# Altium PCB Thermometer.PcbDoc
Units mm, origin at the board's own origin, x right, y up, seen from the top; angles counter-clockwise.
Board outline 30 x 30 mm, 2 copper layers (Top Layer, Bottom Layer); 18 components, 14 nets, 74 pads, 367 vias.
Unrouted connection lines stored in the file: 6.
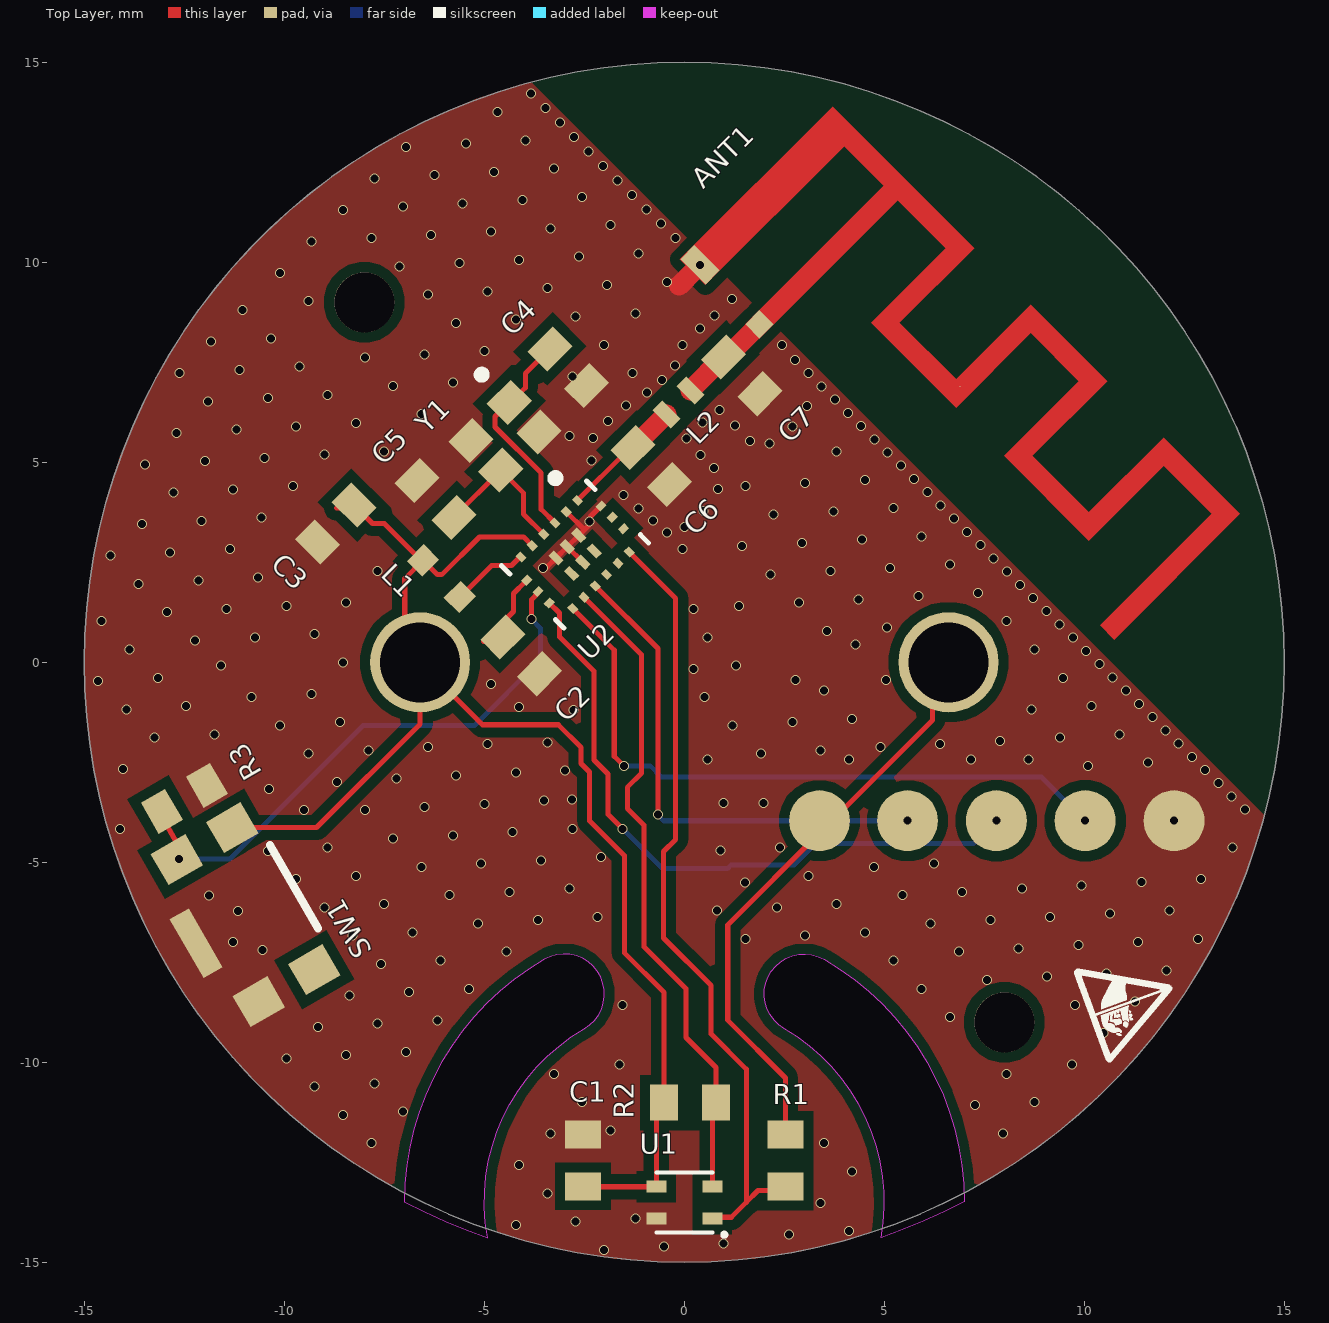
[diagram p0: Top Layer view]
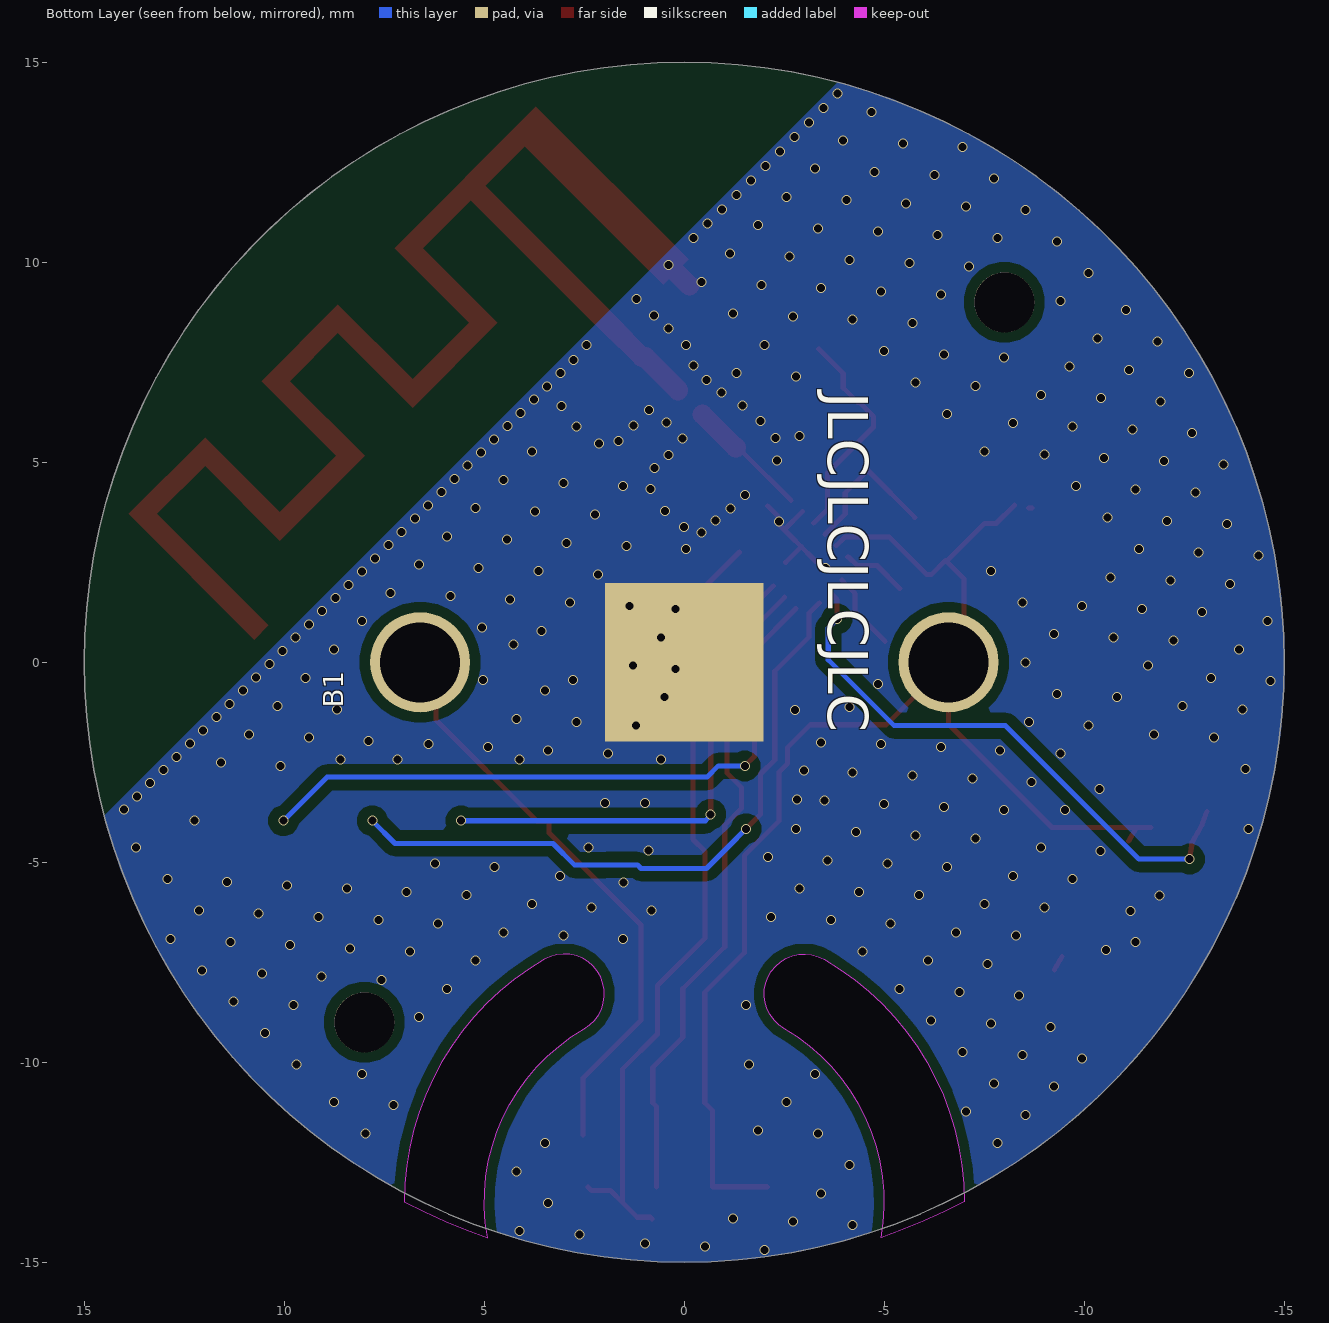
[diagram p1: Bottom Layer view, seen from below]
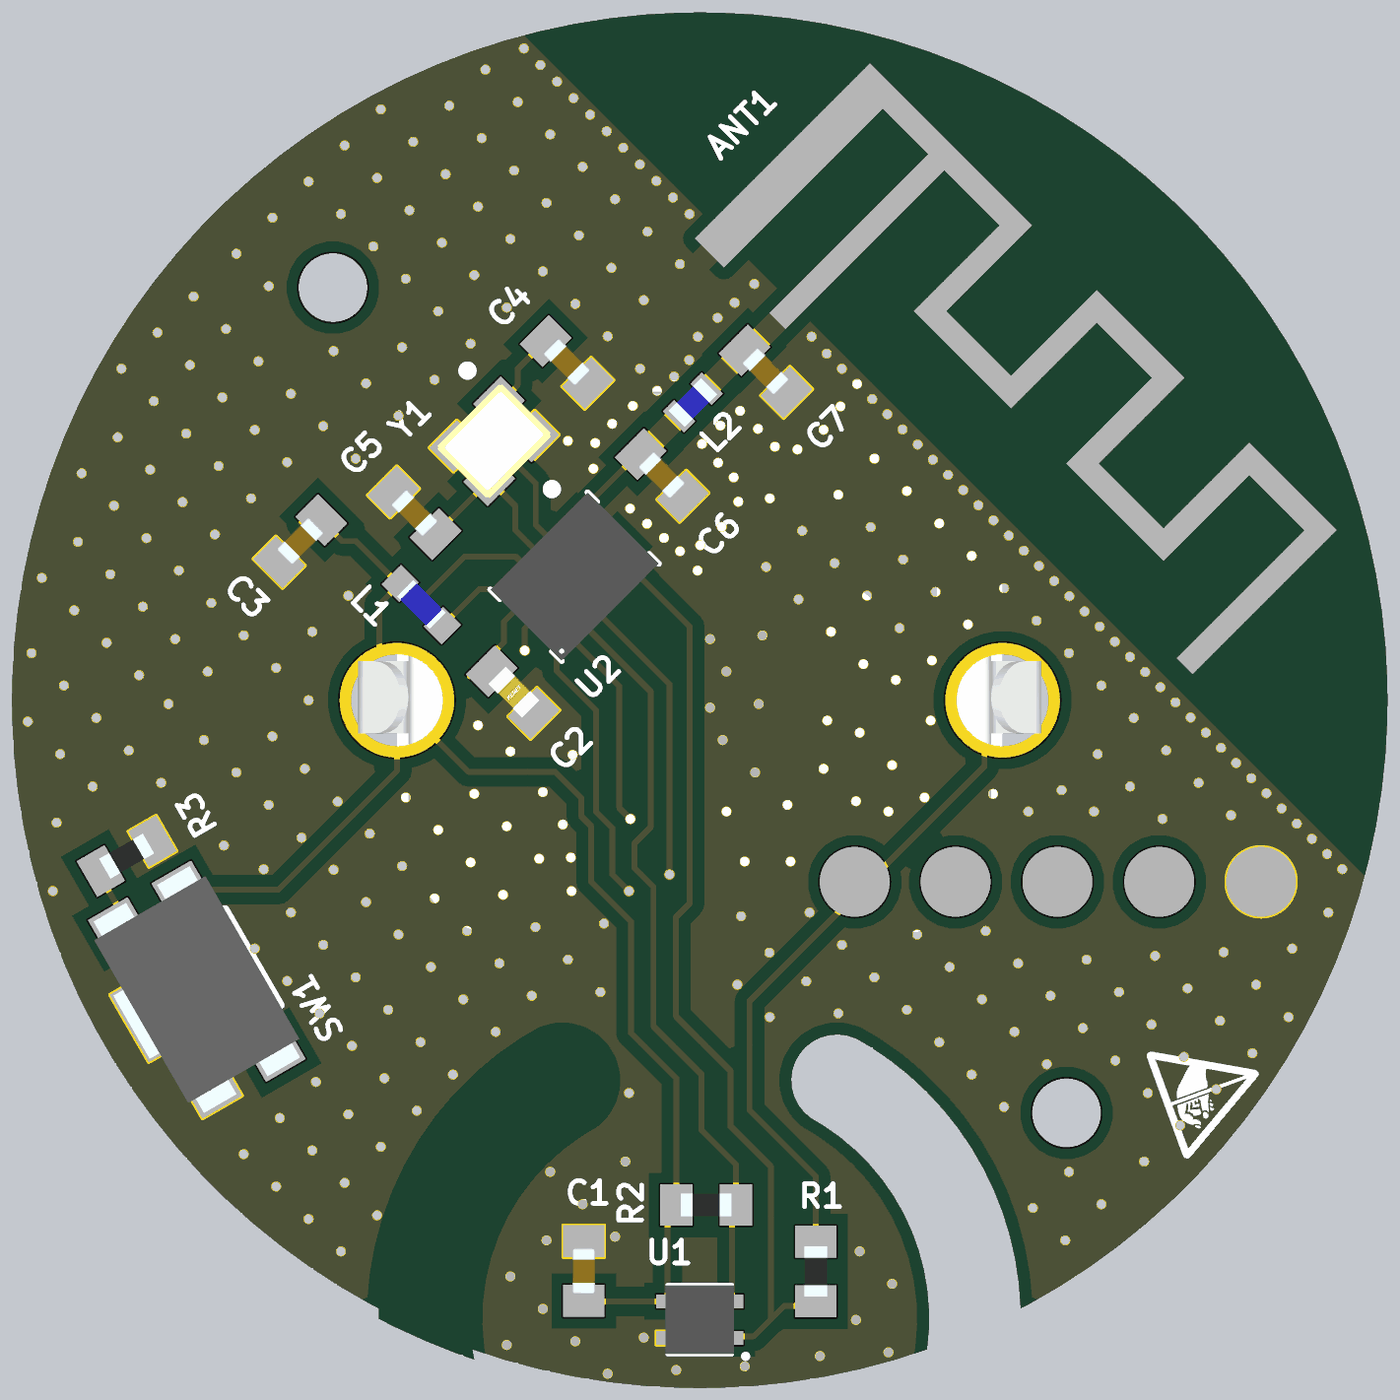
[diagram p2: 3D render of the assembled board from above, using the file's embedded part models]

## Layer stack, top to bottom
Top Solder: solder mask 0.0102, Solder Resist, Dk 3.5
Top Layer: signal copper 0.0356
Dielectric 1: dielectric 0.32, FR-4, Dk 4.8
Bottom Layer: signal copper 0.0356
Bottom Solder: solder mask 0.0102, Solder Resist, Dk 3.5

## Board outline
-15,0 ccw(c0,0) 0,-15 ccw(c0,0) 15,0 ccw(c0,0) 0,15 ccw(c0,0)
cut-out: 4.919,-14.384 ccw(c0,-13.49) 2.5,-9.16 2.497,-9.158 cw(c2.997,-8.292) 3.497,-7.426 3.5,-7.428 cw(c0,-13.49) 7,-13.49 cw(c0,0)
cut-out: -7,-13.49 ccw(c0,0) -4.918,-14.38 -4.919,-14.384 cw(c0,-13.49) -2.5,-9.16 -2.497,-9.158 ccw(c-2.997,-8.292) -3.497,-7.426 -3.5,-7.428 ccw(c0,-13.49)

## Design rules (kind name [scope] priority, off if disabled: settings)
Clearance [All] p1: gap=0.254 ignorepadtopadclearanceinfootprint=TRUE except(0: Arc-Hole Track-Hole SMDPad-Hole THPad-Hole Via-Hole Fill-Hole Poly-Hole Region-Hole Text-Hole; 0.1: Arc-SMDPad Track-SMDPad; 0.127: Arc-Arc Arc-Track Track-Track SMDPad-SMDPad; 0.2: Arc-THPad Track-THPad; 0.5: THPad-THPad)
HoleSize [All] p1: absolutevalues=TRUE maxlimit=6.35 minlimit=0.2 maxpercent=80.000 minpercent=20.000
MinimumSolderMaskSliver MinimumSolderMaskSliver_BGA [HasFootprint('BGA17C25P5X7_169X203X35')] p1: minsoldermaskwidth=0.09
MinimumSolderMaskSliver [All] p2: minsoldermaskwidth=0.1
PlaneConnect [All] p1: planeconnectstyle=Direct reliefexpansion=0.508 reliefentries=4 reliefconductorwidth=0.254 reliefairgap=0.254
PolygonConnect [All] p1: connectstyle=Direct reliefconductorwidth=0.254 reliefentries=4 polygonreliefangle="90 Angle" airgapwidth=0.254
RoutingVias [All] p1: holewidth=0.2 width=0.3 viastyle="Through Hole" minholewidth=0.15 minwidth=0.25 maxholewidth=0.25 maxwidth=1.27
ShortCircuit ShortCircuit_ANT [InNet('ANT')] p1: allowed=TRUE
ShortCircuit [All] p2: allowed=FALSE
SilkToSolderMaskClearance [IsPad] p1: minsilkscreentomaskgap=0.1 clearancetoexposedcopper=TRUE
SolderMaskExpansion [All] p1: expansion=0.038 istentingtop=FALSE
Width [All] p1: maxlimit=0.9 minlimit=0.127 preferedwidth=0.127
25 further rules are at their usual default settings.

## Components (designator, comment, footprint, x,y, rotation, side; value= is the part's Value field where it differs from the comment)
ANT1 "SWRA117" SWRA117 1.878,8.453 r315 top
B1 "2997" 2997 0,0 r0 bottom
C1 "GRM155R71A104MA01D" CAPC1005X60 -2.53,-12.45 r90 top value=0.1uF
C2 "C0402C105K8PAC7411" CAPC1005X60 -4.078,0.173 r315 top
C3 "GRM155R60J106ME05J" CAPC1005X60 -8.713,3.47 r225 top value=10uF
C4 "GCM1555C1H8R0DA16D" CAPC1005X60 -2.901,7.376 r315 top value=8pF
C5 "GCM1555C1H8R0DA16D" CAPC1005X60 -6.221,4.084 r135 top value=8pF
C6 "GRM1555C2A1R8CA01D" CAPC1005X60 -0.829,4.909 r315 top value=1.8pF
C7 "GRM1555C2A1R8CA01D" CAPC1005X60 1.436,7.174 r315 top value=1.8pF
L1 "MLZ1005M2R2WT000" INDC1005X55N -6.072,2.091 r135 top
L2 "LQG15HN3N3S02D" LQG15WH0N7B02D -0.148,6.495 r45 top
R1 "RC0402FR-7W10KL" RES1005 2.53,-12.46 r90 top value=10k
R2 "RC0402FR-7W10KL" RES1005 0.14,-11.01 r180 top value=10k
R3 "RC0402FR-7W10KL" RES1005 -12.5,-3.4 r210 top value=10k
SW1 "435441019830" 435441019830 -10.97,-6.31 r120 top
U1 "STS40-AD1B-R3" STS4X 0,-13.51 r180 top
U2 "DA14531-00000FX2" XCVR_DA14531-00000FX2 -2.73,2.696 r315 top
Y1 "ECS-320-6-37B2-CKM-TR" XTAL_ECS-320-6-37B2-CKM-TR -4.483,5.652 r315 top

## Footprints (in the part's own frame and the unit in brackets; to place one, negate y for a bottom-side part, rotate by r counter-clockwise, add the part's x,y. Pads: shape width x height; smd on the part's side, far side on the other; paste and mask are expansions set on the pad)
2997 [mm]
  round 2.5 hole 2: 1(-6.605,0) 2(6.605,0)
  rect 3.96x3.96 smd: 3(0,0)
  body extent -7.45,-6.99 7.45,5.08, height 6.25
435441019830 [mm]
  rect 0.9x1 smd: 1(2.05,0.8) 2(2.05,-0.8) 3(-2.05,-0.8) 4(-2.05,0.8)
  rect 1.7x0.55 smd: G1(0,1.425)
  silkscreen extent -1.2,-1.4 1.2,-1.4, body extent -2.41,-1.4 2.41,1.65, height 2
CAPC1005X60 [mm]
  rect 0.7x0.9 smd: 1(-0.65,0) 2(0.65,0)
  body extent -0.5,-0.25 0.5,0.25, height 0.55
INDC1005X55N [mm]
  rect 0.55x0.6 smd: 1(-0.65,0) 2(0.65,0)
  body extent -0.5,-0.25 0.5,0.25, height 0.55
LQG15WH0N7B02D [mm]
  rect 0.35x0.65 smd: 1(-0.425,0) 2(0.425,0)
  body extent -0.5,-0.25 0.5,0.25, height 0.55
RES1005 [mm]
  rect 0.7x0.9 smd: 1(-0.65,0) 2(0.65,0)
  body extent -0.55,-0.25 0.55,0.25, height 0.4
STS4X [mm]
  rect 0.5x0.3 smd: 1(-0.7,0.4) 2(-0.7,-0.4) 3(0.7,-0.4) 4(0.7,0.4)
  silkscreen extent -1.05,-0.75 0.7,0.85, body extent -0.75,-0.75 0.75,0.75, height 0.55
SWRA117 [mm]
  rect 0.5x0.5 smd mask+0: 1(0,0)
  round 0.025 smd mask+0: 1(4.65,2.44)
  rect 0.9x0.5 smd mask+0: 2(-2.1,0)
  Top Layer region: -2.55,-0.26 -1.65,-0.26 -1.65,4.64 -0.25,4.64 -0.25,-0.26 0.25,-0.26 0.25,4.64 1.95,4.64 1.95,2 4.95,2 4.95,4.64 6.65,4.64 6.65,2 9.65,2 9.65,4.64 11.35,4.64 11.35,0.7 11.85,0.7 11.85,5.14 9.15,5.14 9.15,2.5 7.15,2.5 7.15,5.14 4.45,5.14 4.45,2.5 2.45,2.5 2.45,5.14 -2.55,5.14
XCVR_DA14531-00000FX2 [mm]
  rect 0.225x0.18 smd: 1(-0.912,1) 2(-0.912,0.6) 3(-0.912,0.2) 4(-0.912,-0.2) 5(-0.912,-0.6) 6(-0.912,-1) 10(0.912,-1) 11(0.912,-0.6) 12(0.912,-0.2) 13(0.912,0.2) 14(0.912,0.6) 15(0.912,1)
  rect 0.18x0.225 smd: 7(-0.4,-1.313) 8(0,-1.313) 9(0.4,-1.313) 16(0.4,1.313) 17(0,1.313) 18(-0.4,1.313)
  rect 0.35x0.2 smd: 19(-0.275,0.4) 20(-0.275,0) 21(-0.275,-0.4) 22(0.275,-0.4) 23(0.275,0) 24(0.275,0.4)
  silkscreen extent -1.8,-1.5 1.1,1.5, body extent -1.1,-1.5 1.1,1.5, height 0.7
XTAL_ECS-320-6-37B2-CKM-TR [mm]
  rect 0.75x0.85 smd: 1(-0.525,0.675) 2(-0.525,-0.675) 3(0.525,-0.675) 4(0.525,0.675)
  silkscreen extent -1.6,0.58 -1.4,0.77, body extent -0.8,-1 0.8,1, height 0.5

## Part data
ANT1: "TI 2.4Ghz PCB Antenna"
B1: "Coin Cell Battery Holders THM .520x.585x.500 No Hole"
C1: "Multilayer Ceramic Capacitors MLCC - SMD/SMT 0.1 uF 10 VDC 20% 0402 X7R"
C2: "Multilayer Ceramic Capacitors MLCC - SMD/SMT 10V 1uF X5R 0402 10%"
C3: "Multilayer Ceramic Capacitors MLCC - SMD/SMT 10 uF 6.3 VDC 20% 0402 X5R"
C4 C5: "Multilayer Ceramic Capacitors MLCC - SMD/SMT 8 pF 50 VDC 0.5 pF 0402 C0G (NP0) AEC-Q200"
C6 C7: "Multilayer Ceramic Capacitors MLCC - SMD/SMT 1.8 pF 100 VDC 0.25 pF 0402 C0G (NP0)"
L1: "Inductor Power Shielded Multi-Layer 2.2uH 20% 2MHz Ferrite 350mA 715mOhm DCR 0402 T/R", Manufacturer_Name=TDK, Mouser Part Number=810-MLZ1005M2R2WT000, Datasheet Link=https://product.tdk.com/system/files/dam/doc/product/inductor/inductor/smd/catalog/inductor_commercial_decoupling_mlz1005_en.pdf, Geometry.Height=0.55mm, Manufacturer_Part_Number=MLZ1005M2R2WT000, Mouser Price/Stock=https://www.mouser.co.uk/ProductDetail/TDK/MLZ1005M2R2WT000?qs=%2FPzWLGNeQ%252BiWY3SLL2a3ow%3D%3D
L2: "Murata LQQ15HN Series Wire-wound SMD Inductor 0.0033 uH +/-0.3nH 300mA Idc Q:8", Manufacturer_Name="Murata Electronics", Mouser Part Number=81-LQG15HN3N3S02D, Datasheet Link=https://psearch.en.murata.com/inductor/product/LQG15HN3N3S02%23.html, Geometry.Height=0.55mm, Manufacturer_Part_Number=LQG15HN3N3S02D, Mouser Price/Stock=https://www.mouser.co.uk/ProductDetail/Murata-Electronics/LQG15HN3N3S02D?qs=wJtOAfHdpWANFtzVLk4I7Q%3D%3D
R1 R2 R3: "Thick Film Resistors - SMD 10 kOhms 125mW 0402 1%", Package=None, Availability=Unavailable, MP=CRCW060310K0FKEBC, Price=None
SW1: "Tactile Switches WS-TASV Tact Switch Washable 4.1x2.8x1.9 mm SMT", Manufacturer_Name="Wurth Elektronik", Mouser Part Number=710-435441019830, Datasheet Link=https://www.we-online.com/catalog/datasheet/435441019830.pdf, Geometry.Height=1.9mm, Manufacturer_Part_Number=435441019830, Mouser Price/Stock=https://www.mouser.co.uk/ProductDetail/Wurth-Elektronik/435441019830?qs=ufv2HEpFn%252BQgnhl%2FsZ0Vfw%3D%3D
U1: "Digital Temperature Sensor, Â±0.2 Â°C, Ultra-Low-Power, I2C fast mode plus", Package="DFN-4 Sensirion", Availability="In Stock", Check_prices=https://www.snapeda.com/parts/STS40-AD1B-R3/Sensirion/view-part/?ref=eda, MF=Sensirion, MP=STS40-AD1B-R3, Price=None, Purchase-URL=https://pricing.snapeda.com/search/part/STS40-AD1B-R3/?ref=eda, SnapEDA_Link=https://www.snapeda.com/parts/STS40-AD1B-R3/Sensirion/view-part/?ref=snap
U2: "IC RF TxRx + MCU Bluetooth Bluetooth v5.1 2.4GHz FCGQFN 24", Package="FCGQFN-24 Dialog Semiconductor GmbH", Check_prices=https://www.snapeda.com/parts/DA14531-00000FX2/Dialog+Semiconductor/view-part/?ref=eda, MF="Dialog Semiconductor GmbH", MP=DA14531-00000FX2, SnapEDA_Link=https://www.snapeda.com/parts/DA14531-00000FX2/Dialog+Semiconductor/view-part/?ref=snap
Y1: "Crystals ESR 50,FREQ 32,STABILITY +/-10ppm,TOLERANCE +/-10ppm,CL 6pF,AGING +/-2 ppm ,-20 C 70 C,10uW in typical (Max 100uW),2.00mm x 1.60mm", Package=None, Availability="In Stock", Check_prices=https://www.snapeda.com/parts/ECS-320-6-37B2-CKM-TR/ECS+Inc./view-part/?ref=eda, MF="ECS Inc.", MP=ECS-320-6-37B2-CKM-TR, Price=None, Purchase-URL=https://pricing.snapeda.com/search/part/ECS-320-6-37B2-CKM-TR/?ref=eda, SnapEDA_Link=https://www.snapeda.com/parts/ECS-320-6-37B2-CKM-TR/ECS+Inc./view-part/?ref=snap

## Free pads (board coordinates)
  round 1.5 hole 1.5 unplated: ""(-8,9) ""(8,-9)
  round 1.524 smd: ""(3.38,-3.96) ""(5.58,-3.96) ""(7.801,-3.96) ""(10.022,-3.96) ""(12.243,-3.96)

## Via types
v1: diameter 0.25, hole 0.2, Top Layer to Bottom Layer, tented both sides, 367 vias

## Nets (pads, with @x,y where several pads share a name; then routed paths per layer and width w, separated by ;. In a path a pad name is that pad's centre, name@x,y a point inside that pad or via, vN(x,y) a via of type N, cw(c..) or ccw(c..) an arc to the next point about the centre after c; other vN are vias at no path point)
ANT: ANT1.1 C7.1 L2.2 | length 2.4
  Top Layer w0.5: L2.2 0.152,6.803 0.976,7.627 C7.1 1.059,7.634 ANT1.1@1.878,8.453
GND: ANT1.2 B1.3 C1.2 C2.2 C3.2 C4.2 C5.2 C6.2 C7.2 pad.@12.243,-3.96 R3.1 SW1.4 SW1.G1 U1.4 U2.2 U2.18 U2.19 U2.20 U2.21 U2.23 Y1.2 Y1.4 | length 4.1
  Top Layer w0.127: v1(-3.529,2.364) -3.505,2.387 -3.427,2.387 U2.21 U2.20 ; U2.2 -2.517,3.332 -2.517,3.298 ; U2.23 U2.20 ; U2.18 -2.345,3.646 -2.345,3.547 v1(-2.369,3.524) -2.392,3.5 -2.392,3.422 -2.517,3.298 ; -0.13,9.4 -0.13,9.414 ; ANT1.2@0.261,9.806 v1(0.393,9.938) ; U2.20 U2.19 -2.517,3.298
  Top Layer w0.5: -0.13,9.414 ANT1.2@0.261,9.806
  other v1: -2.008,-14.689 -0.514,-14.609 0.981,-14.528 2.62,-14.303 4.115,-14.223 -4.21,-14.062 -2.715,-13.982 -1.221,-13.902 3.408,-13.516 -3.422,-13.275 4.195,-12.728 -4.129,-12.568 -7.825,-12.021 3.488,-12.021 -3.342,-11.78 7.972,-11.78 -1.847,-11.7 -8.533,-11.314 -7.038,-11.234 7.265,-11.073 -2.555,-10.993 8.759,-10.993 -9.24,-10.607 -7.745,-10.527 -3.262,-10.286 8.052,-10.286 -1.622,-10.061 9.692,-10.061 -9.947,-9.9 -8.452,-9.82 -6.958,-9.739 10.479,-9.273 -9.159,-9.112 -7.665,-9.032 -6.17,-8.952 6.638,-8.872 -1.542,-8.566 9.772,-8.566 11.266,-8.486 -8.372,-8.325 -6.877,-8.245 -5.383,-8.164 5.931,-8.164 7.57,-7.939 9.065,-7.859 10.559,-7.779 12.054,-7.698 -7.585,-7.538 -6.09,-7.457 5.224,-7.457 -4.451,-7.232 6.863,-7.232 -10.54,-7.19 8.358,-7.152 9.852,-7.071 -11.281,-6.991 11.347,-6.991 1.528,-6.911 12.841,-6.911 -8.292,-6.831 3.022,-6.831 -6.797,-6.75 4.517,-6.75 -5.158,-6.525 6.156,-6.525 -3.663,-6.445 7.651,-6.445 -2.169,-6.364 9.145,-6.364 10.64,-6.284 -11.16,-6.22 0.82,-6.204 12.134,-6.204 2.323,-6.131 -8.999,-6.123 -7.504,-6.043 3.809,-6.043 -11.88,-5.83 -5.865,-5.818 5.449,-5.818 -4.37,-5.738 6.943,-5.738 -2.876,-5.657 8.438,-5.657 9.932,-5.577 1.519,-5.505 11.427,-5.497 -9.706,-5.416 12.922,-5.416 -8.211,-5.336 3.102,-5.336 -6.572,-5.111 4.742,-5.111 -5.077,-5.03 6.236,-5.03 -3.583,-4.95 -2.088,-4.87 -10.405,-4.717 0.901,-4.709 -8.918,-4.629 2.395,-4.629 13.709,-4.629 -7.279,-4.404 -5.784,-4.323 -4.29,-4.243 -14.109,-4.163 -2.795,-4.163 12.243,-3.96 -9.511,-3.687 -7.986,-3.697 14.014,-3.684 -6.492,-3.616 -4.997,-3.536 0.981,-3.517 1.98,-3.517 -3.503,-3.456 -2.813,-3.43 13.683,-3.353 -10.379,-3.168 13.353,-3.023 -8.686,-2.997 -7.199,-2.909 -5.704,-2.829 -4.21,-2.749 -2.988,-2.71 13.022,-2.692 -14.029,-2.668 10.093,-2.588 11.588,-2.508 0.583,-2.427 4.115,-2.427 7.166,-2.427 8.599,-2.427 12.691,-2.361 -9.4,-2.282 1.913,-2.282 -7.898,-2.21 3.408,-2.202 -6.411,-2.122 4.902,-2.122 -4.917,-2.041 6.397,-2.041 12.361,-2.031 -3.422,-2.003 7.891,-1.961 -13.241,-1.881 9.386,-1.881 -11.747,-1.801 10.881,-1.801 12.03,-1.7 -10.107,-1.575 1.206,-1.575 -8.613,-1.495 2.701,-1.495 4.195,-1.415 11.699,-1.369 -13.949,-1.174 -2.773,-1.192 8.679,-1.174 -4.129,-1.117 -12.454,-1.093 10.173,-1.093 11.368,-1.038 -10.815,-0.868 0.499,-0.868 -9.32,-0.788 3.488,-0.708 11.038,-0.708 -4.836,-0.547 -14.656,-0.467 2.781,-0.443 5.037,-0.443 -13.161,-0.386 9.466,-0.386 10.707,-0.377 0.225,-0.161 -11.587,-0.081 1.287,-0.081 10.376,-0.046 -8.533,0 10.045,0.285 -13.868,0.321 8.759,0.321 4.276,0.443 -12.229,0.546 -10.734,0.626 0.579,0.626 9.715,0.615 -9.24,0.707 3.569,0.787 5.063,0.867 9.384,0.946 -14.575,1.028 8.052,1.028 -12.936,1.253 9.053,1.277 -11.441,1.334 0.225,1.334 -9.947,1.414 1.367,1.414 -8.452,1.494 2.861,1.494 4.356,1.574 8.722,1.608 5.85,1.655 7.345,1.735 8.392,1.938 -13.643,1.96 -12.148,2.041 -10.654,2.121 2.154,2.201 -7.665,2.282 3.649,2.282 8.061,2.269 5.143,2.362 6.638,2.442 7.73,2.6 -14.35,2.667 -12.856,2.748 -11.361,2.828 -0.047,2.828 1.447,2.908 7.4,2.93 2.942,2.989 4.436,3.069 5.931,3.149 -0.43,3.25 7.069,3.261 0.01,3.38 -13.563,3.455 -12.068,3.535 -0.78,3.54 6.738,3.592 -10.574,3.615 2.235,3.696 0.48,3.78 3.729,3.776 -1.15,3.85 5.224,3.856 6.407,3.923 -1.52,4.18 -12.775,4.242 6.077,4.253 -11.281,4.323 0.84,4.33 -9.786,4.403 1.528,4.403 3.022,4.483 4.517,4.563 5.746,4.584 0.74,4.86 5.415,4.915 -13.482,4.949 -11.988,5.03 -2.32,5.05 -10.493,5.11 -8.999,5.19 0.4,5.18 5.084,5.246 -7.504,5.271 3.809,5.271 2.13,5.47 1.64,5.53 4.754,5.576 0.05,5.59 -2.28,5.61 -2.876,5.656 -12.695,5.737 -11.2,5.817 -9.706,5.897 2.7,5.9 4.423,5.907 1.27,5.92 -8.211,5.978 0.45,5.99 -1.91,6.03 -6.572,6.203 4.092,6.238 0.88,6.31 -1.46,6.42 3.07,6.41 -11.908,6.524 3.761,6.569 -10.413,6.604 -8.918,6.685 -0.93,6.75 3.431,6.899 -7.279,6.91 -5.784,6.99 -0.56,7.06 -2.795,7.151 -12.615,7.231 -1.301,7.231 3.1,7.23 -11.12,7.312 -9.626,7.392 -0.23,7.42 2.769,7.561 -7.986,7.617 -6.492,7.697 -4.997,7.778 -2.008,7.938 -0.04,7.93 2.44,7.93 -11.827,8.019 -10.333,8.099 0.39,8.34 -5.704,8.485 -4.21,8.565 -2.715,8.645 0.76,8.67 -1.221,8.726 -11.04,8.806 -9.4,9.031 1.19,9.08 -6.411,9.192 -4.917,9.272 -3.422,9.353 -1.928,9.433 -0.433,9.513 -10.107,9.738 -7.118,9.899 -5.624,9.979 -4.129,10.06 -2.635,10.14 -1.14,10.22 -9.32,10.526 -7.825,10.606 -0.224,10.604 -6.331,10.687 -4.836,10.767 -3.342,10.847 -1.847,10.927 -0.586,10.966 -8.533,11.313 -0.947,11.327 -7.038,11.394 -5.544,11.474 -4.049,11.554 -2.555,11.635 -1.308,11.688 -1.669,12.049 -7.745,12.101 -6.251,12.181 -4.756,12.261 -3.262,12.342 -2.03,12.41 -2.391,12.771 -6.958,12.888 -5.463,12.968 -3.969,13.049 -2.752,13.132 -3.113,13.493 -4.676,13.756 -3.474,13.854 -3.836,14.216
I2C_SCL: R2.1 U1.2 U2.11 | length 16.4
  Top Layer w0.127: U2.11 -1.071,0.189 -1.071,-2.772 -1.426,-3.126 -1.426,-3.655 -1.01,-4.071 -1.01,-7.11 0.04,-8.16 0.04,-9.38 0.79,-10.13 R2.1 0.7,-11.1 U1.2
I2C_SDA: R1.1 U1.1 U2.15 | length 19.6
  Top Layer w0.127: U2.15 -0.218,1.598 -0.218,-4.428 -0.52,-4.73 -0.52,-6.89 0.67,-8.08 0.67,-9.29 1.55,-10.17 1.55,-13.5 ; U1.1@0.81,-13.91 0.846,-13.874 1.176,-13.874 1.55,-13.5 ; R1.1@2.41,-13.12 2.324,-13.206 1.844,-13.206 1.55,-13.5
NetC2_1: C2.1 U2.7 | length 2
  Top Layer w0.127: C2.1@-5.015,0.524 -4.271,1.268 -4.271,1.72 -3.975,2.016 U2.7
NetC4_1: C4.1 U2.3 Y1.1 | length 5.6
  Top Layer w0.127: C4.1 -3.974,7.222 -3.974,6.863 -4.336,6.5 Y1.1 -4.731,6.146 -4.731,5.886 -3.578,4.733 -3.578,3.828 U2.3
NetC5_1: C5.1 U2.4 Y1.3 | length 3.7
  Top Layer w0.127: C5.1 -4.589,4.796 Y1.3 -4.024,4.238 -4.024,3.707 U2.4
NetC6_1: C6.1 L2.1 U2.1 | length 2.9
  Top Layer w0.127: U2.1 C6.1@-1.462,5.254
  Top Layer w0.5: C6.1 -1.281,5.369 -0.456,6.194 L2.1
NetL1_1: L1.1 U2.6 | length 1.6
  Top Layer w0.127: -5.388,1.848 -4.816,2.42 -4.321,2.42 -4.107,2.634 U2.6
ON/OFF: R3.2 SW1.1 U2.8 | length 14.2
  Top Layer w0.127: R3.2 -12.929,-4.094 -12.698,-4.494 v1(-12.63,-4.92) ; v1(-3.817,1.085) -3.817,1.571 -3.658,1.731 U2.8
  Bottom Layer w0.127: v1(-12.63,-4.92) -11.37,-4.92 -8.032,-1.583 -5.246,-1.583 -3.599,0.065 -3.599,0.857 -3.817,1.076 v1(-3.817,1.085)
RESET: pad.@10.022,-3.96 U2.10 | length 16.6
  Top Layer w0.127: U2.10 -1.752,0.305 -1.752,-2.35 v1(-1.514,-2.589)
  Bottom Layer w0.127: v1(-1.514,-2.589) -0.851,-2.589 -0.569,-2.87 8.932,-2.87 v1(10.022,-3.96)
SWCLK: pad.@5.58,-3.96 U2.12 | length 12.7
  Top Layer w0.127: U2.12 -0.66,0.344 v1(-0.66,-3.8)
  Bottom Layer w0.127: v1(-0.66,-3.8) -0.66,-3.824 -0.524,-3.96 v1(5.58,-3.96)
SWDIO: pad.@7.801,-3.96 U2.9 | length 16.7
  Top Layer w0.127: U2.9 -3.12,1.23 -3.12,0.64 -2.26,-0.22 -2.26,-2.44 -1.906,-2.794 -1.906,-3.801 v1(-1.544,-4.163)
  Bottom Layer w0.127: v1(-1.544,-4.163) -1.09,-4.617 -0.555,-5.152 1.084,-5.152 1.173,-5.063 1.953,-5.063 1.961,-5.071 2.741,-5.071 3.285,-4.527 7.233,-4.527 v1(7.801,-3.96)
VBAT: B1.1 B1.2 C1.1 C3.1 L1.2 pad.@3.38,-3.96 R1.2 R2.2 SW1.2 SW1.3 U1.3 U2.5 | length 50.2
  Top Layer w0.127: SW1.2@-11.671,-4.13 -9.193,-4.13 -6.605,-1.542 B1.1 ; SW1.2 SW1.2@-11.109,-4.469 ; SW1.3@-9.445,-7.351 SW1.3 ; -8.696,3.859 C3.1@-8.606,3.859 ; C3.1 -7.794,3.47 -7.5,3.47 -6.58,2.55 L1.2 ; U2.5 -4.016,3.135 -5.123,3.135 -6.067,2.191 -6.172,2.191 L1.2 ; -2.078,-13.12 cw(c-2.054,-13.144) -2.054,-13.11 U1.3 -0.7,-11.2 R2.2 -0.51,-8.25 -1.5,-7.26 -1.5,-4.832 -2.37,-3.962 -2.37,-2.744 -2.584,-2.53 -2.584,-2.126 -3.15,-1.56 -5.045,-1.56 B1.1 ; R1.2 2.53,-10.39 1.085,-8.945 1.085,-6.565 3.38,-4.27 3.38,-3.96 3.69,-3.96 6.209,-1.441 6.209,-0.396 B1.2 ; B1.1 -6.99,0.385 -6.99,2.091 L1.2
pads on no net: U2.13 U2.14 U2.16 U2.17 U2.22 U2.24

## Polygon pours and split planes (outlines as drawn)
GND on Bottom Layer "GND_BOTTOM" (solid, pour order 1): -15,0 ccw(c0,0) 0,-15 ccw(c0,0) 15,0 ccw(c0,0) 0,15 ccw(c0,0)
GND on Top Layer "GND_TOP" (solid, pour order 0): -15,0 ccw(c0,0) 0,-15 ccw(c0,0) 15,0 ccw(c0,0) 0,15 ccw(c0,0)

## Other copper
Top Layer:
  pour cut-out: -3.887,14.563 cw(c0.004,0.004) 14.563,-3.887
Bottom Layer:
  pour cut-out: -3.887,14.563 cw(c0.004,0.004) 14.563,-3.887

## Silkscreen, mask and mechanical layers (free items; w line width, h text height)
Top Overlay:
  drawing of 7 lines, arcs and shapes, not listed
Bottom Overlay:
  text "JLCJLCJLCJLC" at -3.603,6.757 h1 r90
Bottom Paste:
  region: -4.925,-14.385 cw(c0,-13.49) 5.005,-13.49 cw(c0,-13.49) 4.927,-14.371 5.022,-14.35 cw(c0,0)
Bottom Solder:
  region: -4.925,-14.385 cw(c0,-13.49) 5.005,-13.49 cw(c0,-13.49) 4.927,-14.371 5.022,-14.35 cw(c0,0)
  lines w0.01: -4.92,-14.38 ccw(c0,0) 5.021,-14.345 ; -4.919,-14.384 cw(c0,-13.49) 4.92,-14.38
Mechanical 1:
  drawing of 339 lines, arcs and shapes, not listed